# Altium PCB main_V3.0.PcbDoc
Units mm, origin at the board's own origin, x right, y up, seen from the top; angles counter-clockwise.
Board outline 144.58 x 96.87 mm, 2 copper layers (Top Layer, Bottom Layer); 81 components, 42 nets, 482 pads, 102 vias.
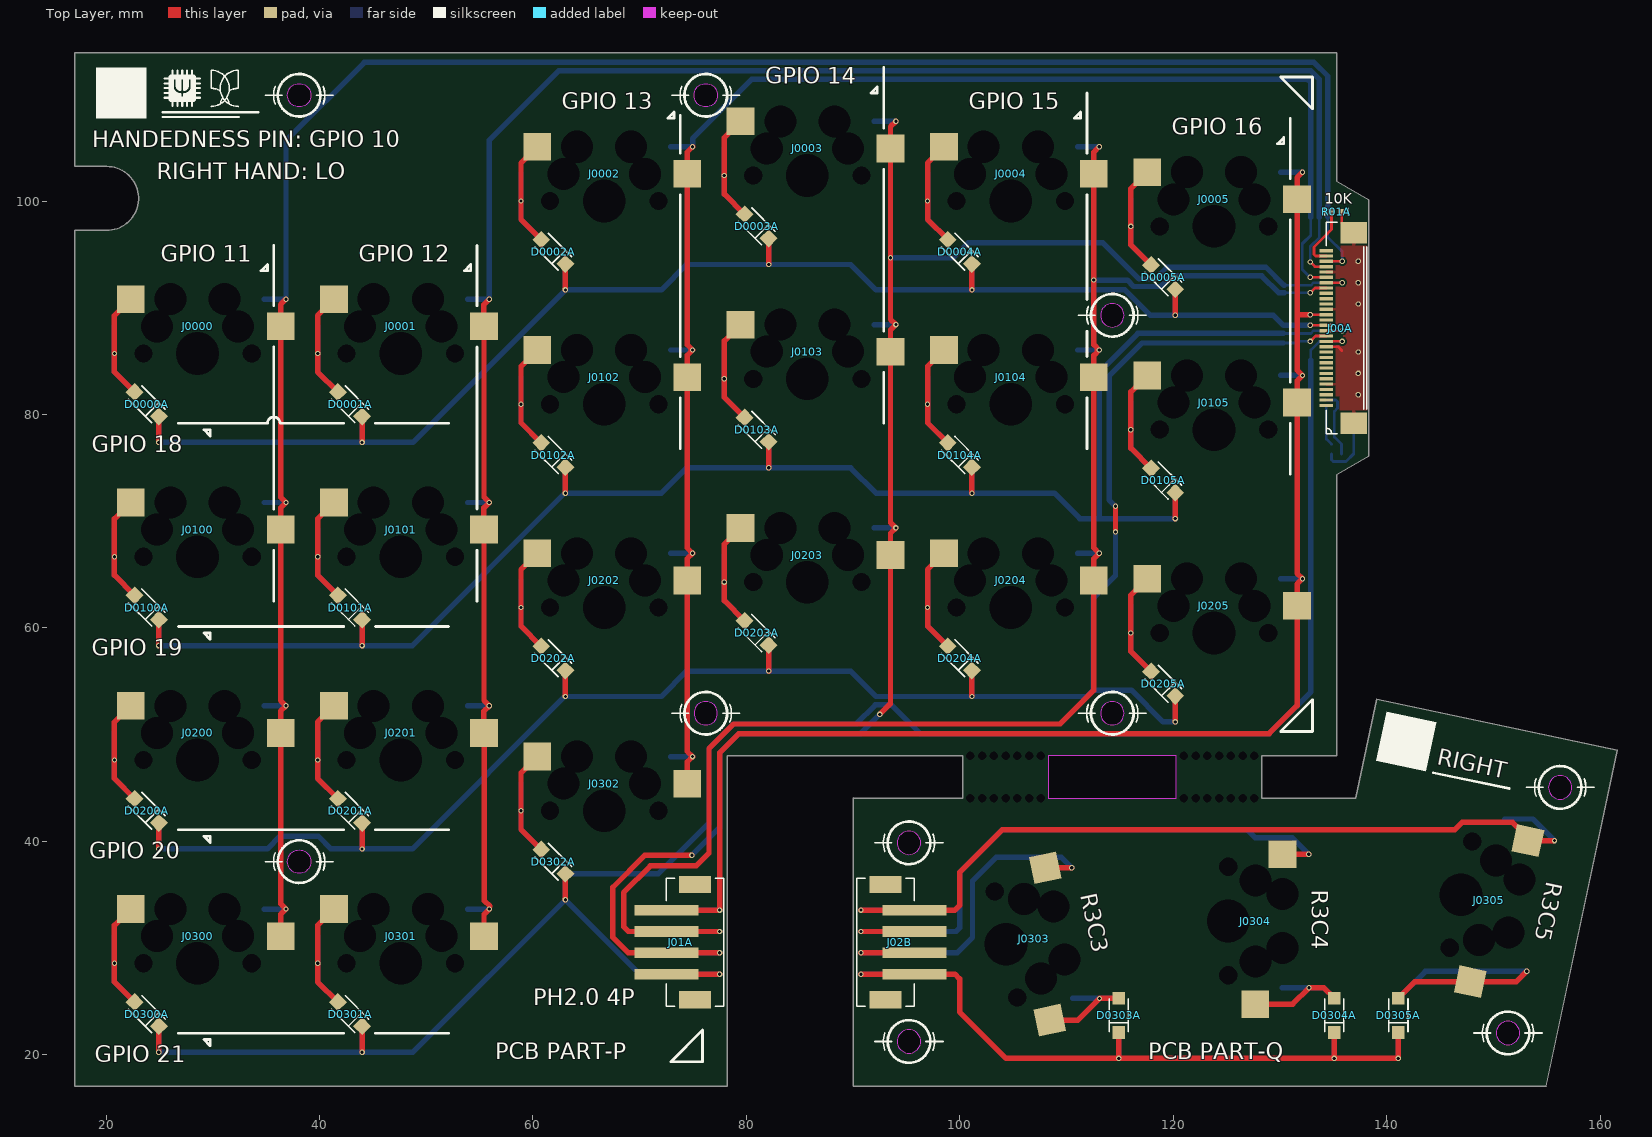
[diagram p0: Top Layer view]
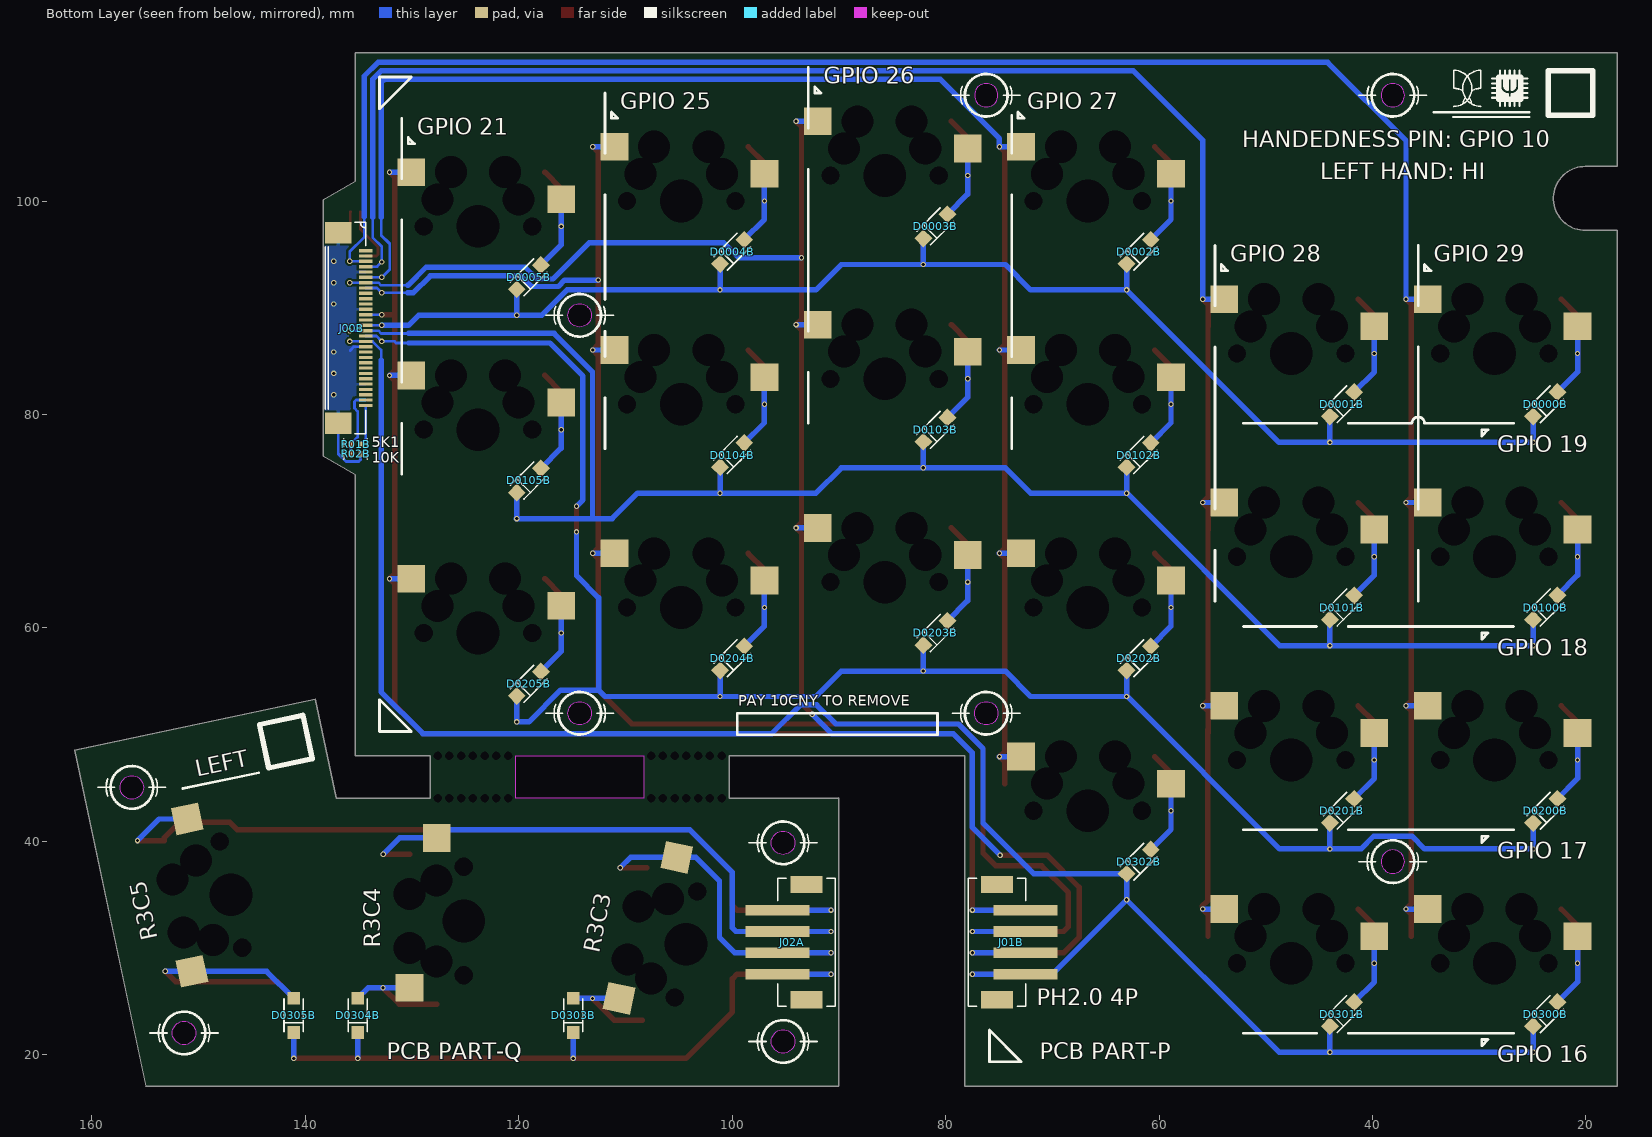
[diagram p1: Bottom Layer view, seen from below]
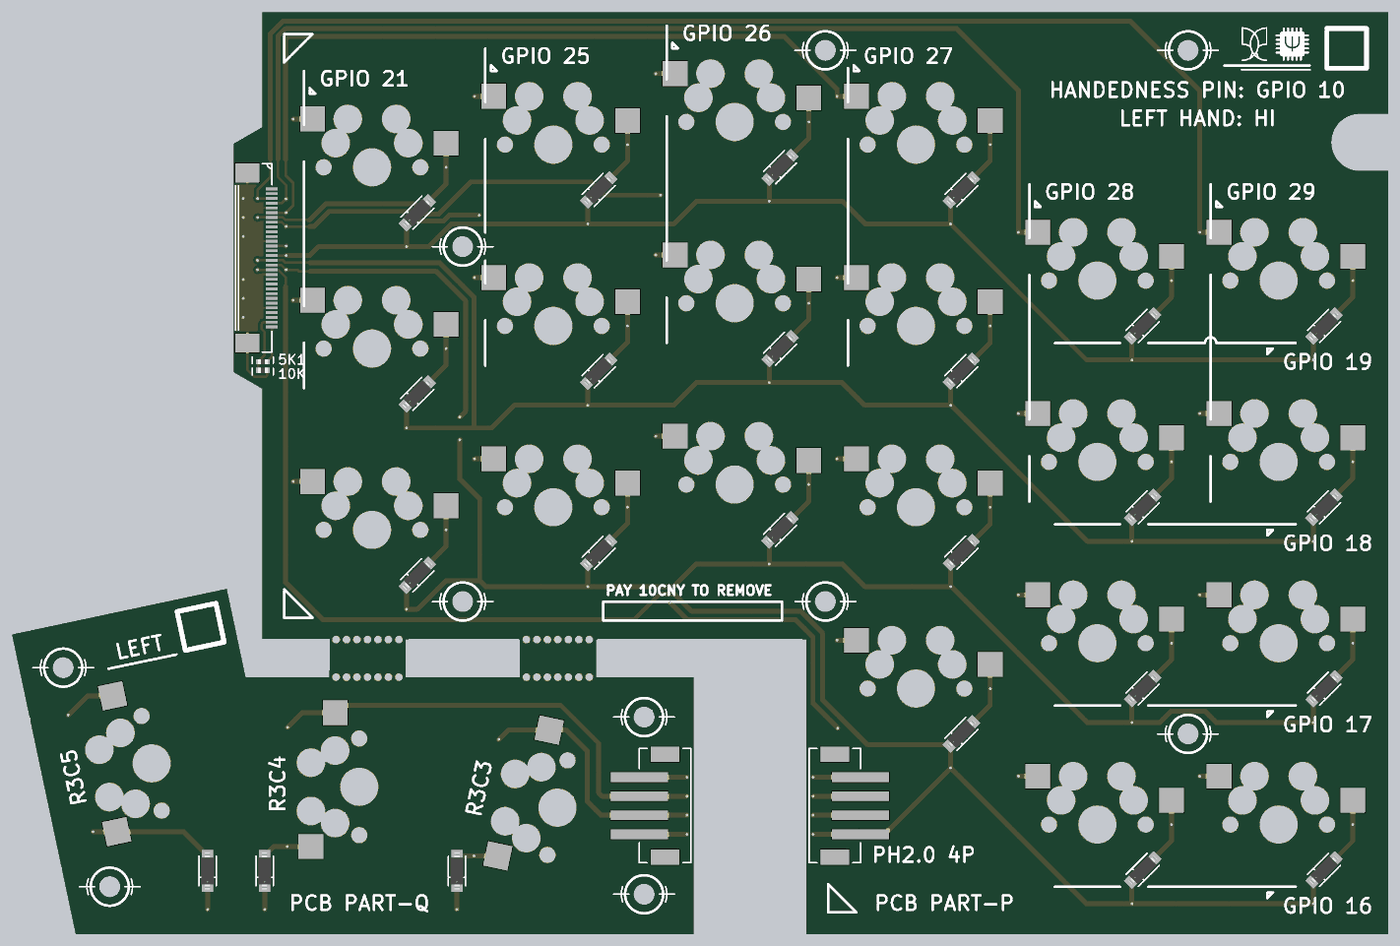
[diagram p2: 3D render of the assembled board from below, using the file's embedded part models]

## Layer stack, top to bottom
Top Solder: solder mask 0.0102, Solder Resist, Dk 3.5
Top Layer: signal copper 0.0356
Dielectric 1: dielectric 0.32, FR-4, Dk 4.8
Bottom Layer: signal copper 0.0356
Bottom Solder: solder mask 0.0102, Solder Resist, Dk 3.5

## Board outline
17.05,17.05 78.2,17.05 78.2,48.006 100.3,48.006 100.3,44.061 90.043,44.061 90.042,44.069 90.042,17.05 154.94,17.05 161.634,48.541 139.087,53.333 137.116,44.061 128.3,44.061 128.3,48.006 135.35,48.006 135.35,74.374 138.35,76.106 138.35,100.106 135.35,101.838 135.35,113.919 17.05,113.919 17.05,103.25 20.05,103.25 cw(c20.05,100.25) 20.05,97.25 17.05,97.25
cut-out: 155.167,45.056 ccw(c156.267,45.056) 156.267,43.956 ccw(c156.267,45.056) 157.367,45.056 ccw(c156.267,45.056) 156.267,46.156 ccw(c156.267,45.056)
cut-out: 150.276,22.045 ccw(c151.376,22.045) 151.376,20.945 ccw(c151.376,22.045) 152.476,22.045 ccw(c151.376,22.045) 151.376,23.145 ccw(c151.376,22.045)
cut-out: 94.141,21.249 ccw(c95.241,21.249) 95.241,20.149 ccw(c95.241,21.249) 96.341,21.249 ccw(c95.241,21.249) 95.241,22.349 ccw(c95.241,21.249)
cut-out: 94.141,39.862 ccw(c95.241,39.862) 95.241,38.762 ccw(c95.241,39.862) 96.341,39.862 ccw(c95.241,39.862) 95.241,40.962 ccw(c95.241,39.862)
cut-out: 113.2,52.006 ccw(c114.3,52.006) 114.3,50.906 ccw(c114.3,52.006) 115.4,52.006 ccw(c114.3,52.006) 114.3,53.106 ccw(c114.3,52.006)
cut-out: 113.2,89.297 ccw(c114.3,89.297) 114.3,88.197 ccw(c114.3,89.297) 115.4,89.297 ccw(c114.3,89.297) 114.3,90.397 ccw(c114.3,89.297)
cut-out: 76.2,108.819 cw(c76.2,109.919) 75.1,109.919 cw(c76.2,109.919) 76.2,111.019 cw(c76.2,109.919) 77.3,109.919 cw(c76.2,109.919)
cut-out: 75.1,52.006 ccw(c76.2,52.006) 76.2,50.906 ccw(c76.2,52.006) 77.3,52.006 ccw(c76.2,52.006) 76.2,53.106 ccw(c76.2,52.006)
cut-out: 38.1,37 cw(c38.1,38.1) 37,38.1 cw(c38.1,38.1) 38.1,39.2 cw(c38.1,38.1) 39.2,38.1 cw(c38.1,38.1)
cut-out: 38.1,108.819 cw(c38.1,109.919) 37,109.919 cw(c38.1,109.919) 38.1,111.019 cw(c38.1,109.919) 39.2,109.919 cw(c38.1,109.919)
cut-out: 108.3,44.061 120.3,44.061 120.3,48.006 108.3,48.006

## Design rules (kind name [scope] priority, off if disabled: settings)
Clearance [All] p1: gap=0.254 ignorepadtopadclearanceinfootprint=FALSE except(0.102: Arc-Arc Arc-Track Arc-SMDPad Track-Track Track-SMDPad; 0.152: SMDPad-SMDPad SMDPad-Hole; 0.2: Via-Fill Via-Poly Via-Region; 0.203: Arc-Via Arc-Hole Track-Via Track-Hole Via-Via; 0.279: Arc-THPad Track-THPad; 0.457: THPad-THPad)
HoleSize [All] p1: absolutevalues=TRUE maxlimit=10 minlimit=0.025 maxpercent=80.000 minpercent=20.000
PolygonConnect [All] p1: thpad.connectstyle=Relief thpad.reliefconductorwidth=0.254 thpad.reliefentries=4 thpad.polygonreliefangle="90 Angle" thpad.airgapwidth=0.254 smdpad.connectstyle=Relief smdpad.reliefconductorwidth=0.254 smdpad.reliefentries=4 smdpad.polygonreliefangle="90 Angle" smdpad.airgapwidth=0.254 via.connectstyle=Direct via.reliefconductorwidth=0.254 via.reliefentries=4 via.polygonreliefangle="90 Angle" via.airgapwidth=0.254
RoutingVias [All] p1: holewidth=0.3 width=0.5 viastyle="Through Hole" minholewidth=0.2 minwidth=0.45 maxholewidth=0.711 maxwidth=1.27
SolderMaskExpansion [All] p1: expansion=0.102 istentingtop=FALSE
SupplyNets "Schematic Supply Nets_1" [InNet('+5')] p1: voltage=0.000
SupplyNets "Schematic Supply Nets" [InNet('GND')] p2: voltage=0.000
Width [All] p1: maxlimit=2.54 minlimit=0.102 preferedwidth=0.254 minimp=50.000000 maximp=50.000000 favimp=50.000000
29 further rules are at their usual default settings.

## Components (designator, comment, footprint, x,y, rotation, side; value= is the part's Value field where it differs from the comment)
D0000A "1N4148W" SOD123_DIO 23.812,80.962 r135 top
D0000B "1N4148W" SOD123_DIO 23.812,80.962 r135 bottom
D0001A "1N4148W" SOD123_DIO 42.862,80.962 r135 top
D0001B "1N4148W" SOD123_DIO 42.862,80.962 r135 bottom
D0002A "1N4148W" SOD123_DIO 61.912,95.25 r135 top
D0002B "1N4148W" SOD123_DIO 61.912,95.25 r135 bottom
D0003A "1N4148W" SOD123_DIO 80.962,97.631 r135 top
D0003B "1N4148W" SOD123_DIO 80.962,97.631 r135 bottom
D0004A "1N4148W" SOD123_DIO 100.013,95.25 r135 top
D0004B "1N4148W" SOD123_DIO 100.013,95.25 r135 bottom
D0005A "1N4148W" SOD123_DIO 119.062,92.869 r135 top
D0005B "1N4148W" SOD123_DIO 119.062,92.869 r135 bottom
D0100A "1N4148W" SOD123_DIO 23.812,61.912 r135 top
D0100B "1N4148W" SOD123_DIO 23.812,61.912 r135 bottom
D0101A "1N4148W" SOD123_DIO 42.862,61.912 r135 top
D0101B "1N4148W" SOD123_DIO 42.862,61.912 r135 bottom
D0102A "1N4148W" SOD123_DIO 61.912,76.2 r135 top
D0102B "1N4148W" SOD123_DIO 61.912,76.2 r135 bottom
D0103A "1N4148W" SOD123_DIO 80.962,78.581 r135 top
D0103B "1N4148W" SOD123_DIO 80.962,78.581 r135 bottom
D0104A "1N4148W" SOD123_DIO 100.013,76.2 r135 top
D0104B "1N4148W" SOD123_DIO 100.013,76.2 r135 bottom
D0105A "1N4148W" SOD123_DIO 119.062,73.819 r135 top
D0105B "1N4148W" SOD123_DIO 119.062,73.819 r135 bottom
D0200A "1N4148W" SOD123_DIO 23.812,42.862 r135 top
D0200B "1N4148W" SOD123_DIO 23.812,42.862 r135 bottom
D0201A "1N4148W" SOD123_DIO 42.862,42.862 r135 top
D0201B "1N4148W" SOD123_DIO 42.862,42.862 r135 bottom
D0202A "1N4148W" SOD123_DIO 61.912,57.15 r135 top
D0202B "1N4148W" SOD123_DIO 61.912,57.15 r135 bottom
D0203A "1N4148W" SOD123_DIO 80.962,59.531 r135 top
D0203B "1N4148W" SOD123_DIO 80.962,59.531 r135 bottom
D0204A "1N4148W" SOD123_DIO 100.013,57.15 r135 top
D0204B "1N4148W" SOD123_DIO 100.013,57.15 r135 bottom
D0205A "1N4148W" SOD123_DIO 119.062,54.769 r135 top
D0205B "1N4148W" SOD123_DIO 119.062,54.769 r135 bottom
D0300A "1N4148W" SOD123_DIO 23.812,23.812 r135 top
D0300B "1N4148W" SOD123_DIO 23.812,23.812 r135 bottom
D0301A "1N4148W" SOD123_DIO 42.862,23.812 r135 top
D0301B "1N4148W" SOD123_DIO 42.862,23.812 r135 bottom
D0302A "1N4148W" SOD123_DIO 61.912,38.1 r135 top
D0302B "1N4148W" SOD123_DIO 61.912,38.1 r135 bottom
D0303A "1N4148W" SOD123_DIO 114.9,23.7 r90 top
D0303B "1N4148W" SOD123_DIO 114.9,23.7 r90 bottom
D0304A "1N4148W" SOD123_DIO 135.1,23.7 r90 top
D0304B "1N4148W" SOD123_DIO 135.1,23.7 r90 bottom
D0305A "1N4148W" SOD123_DIO 141.1,23.7 r90 top
D0305B "1N4148W" SOD123_DIO 141.1,23.7 r90 bottom
J0000 "Gateron_V2" Gateron_V2 28.575,85.725 r180 top
J00A "FPC-05F-20PH20" FPC-05F-30PH20 134.35,88.106 r90 top
J00B "FPC-05F-20PH20" FPC-05F-30PH20 134.35,88.106 r270 bottom
J0001 "Gateron_V2" Gateron_V2 47.625,85.725 r180 top
J01A "PH2.0x4" PH2.0x4P 75.5,30.555 r270 top
J01B "PH2.0x4" PH2.0x4P 75.5,30.555 r90 bottom
J0002 "Gateron_V2" Gateron_V2 66.675,100.013 r180 top
J02A "PH2.0x4" PH2.0x4P 92.742,30.555 r270 bottom
J02B "PH2.0x4" PH2.0x4P 92.742,30.555 r90 top
J0003 "Gateron_V2" Gateron_V2 85.725,102.394 r180 top
J0004 "Gateron_V2" Gateron_V2 104.775,100.013 r180 top
J0005 "Gateron_V2" Gateron_V2 123.825,97.631 r180 top
J0100 "Gateron_V2" Gateron_V2 28.575,66.675 r180 top
J0101 "Gateron_V2" Gateron_V2 47.625,66.675 r180 top
J0102 "Gateron_V2" Gateron_V2 66.675,80.962 r180 top
J0103 "Gateron_V2" Gateron_V2 85.725,83.344 r180 top
J0104 "Gateron_V2" Gateron_V2 104.775,80.962 r180 top
J0105 "Gateron_V2" Gateron_V2 123.825,78.581 r180 top
J0200 "Gateron_V2" Gateron_V2 28.575,47.625 r180 top
J0201 "Gateron_V2" Gateron_V2 47.625,47.625 r180 top
J0202 "Gateron_V2" Gateron_V2 66.675,61.912 r180 top
J0203 "Gateron_V2" Gateron_V2 85.725,64.294 r180 top
J0204 "Gateron_V2" Gateron_V2 104.775,61.912 r180 top
J0205 "Gateron_V2" Gateron_V2 123.825,59.531 r180 top
J0300 "Gateron_V2" Gateron_V2 28.575,28.575 r180 top
J0301 "Gateron_V2" Gateron_V2 47.625,28.575 r180 top
J0302 "Gateron_V2" Gateron_V2 66.675,42.862 r180 top
J0303 "Gateron_V2" Gateron_V2 104.34,30.347 r102 top
J0304 "Gateron_V2" Gateron_V2 125.162,32.536 r90 top
J0305 "Gateron_V2" Gateron_V2 146.974,35.006 r78 top
R01A "10K" RES0402_CPF_TYCO_TYC 135.3,99 r0 top
R01B "5.1K" RES0402_CPF_TYCO_TYC 135.3,77.2 r0 bottom
R02B "10K" RES0402_CPF_TYCO_TYC 135.3,76.3 r180 bottom

## Footprints (in the part's own frame and the unit in brackets; to place one, negate y for a bottom-side part, rotate by r counter-clockwise, add the part's x,y. Pads: shape width x height; smd on the part's side, far side on the other; paste and mask are expansions set on the pad)
FPC-05F-30PH20 [mm]
  rect 0.3x1.25 smd mask+0: 1(-7.25,0) 2(-6.75,0) 3(-6.25,0) 4(-5.75,0) 5(-5.25,0) 6(-4.75,0) 7(-4.25,0) 8(-3.75,0) 9(-3.25,0) 10(-2.75,0) 11(-2.25,0) 12(-1.75,0) 13(-1.25,0) 14(-0.75,0) 15(-0.25,0) 16(0.25,0) 17(0.75,0) 18(1.25,0) 19(1.75,0) 20(2.25,0) 21(2.75,0) 22(3.25,0) 23(3.75,0) 24(4.25,0) 25(4.75,0) 26(5.25,0) 27(5.75,0) 28(6.25,0) 29(6.75,0) 30(7.25,0)
  rect 2x2.5 smd: P1(-8.94,-2.575) P2(8.94,-2.575)
  silkscreen extent -9.9,-3.8 9.9,0
Gateron_V2 [mm]
  rect 2.6x2.6 smd: 1(-7.79,-2.54) 2(6.26,-5.08)
  rect 2.6x2.6 smd far side: 1(-6.26,-5.08) 2(7.79,-2.54)
  round 0 hole 1.7: ""(-5.08,0) ""(5.08,0)
  round 0 hole 3: ""(-3.81,-2.54) ""(-2.54,-5.08) ""(2.54,-5.08) ""(3.81,-2.54)
  round 0 hole 4: ""(0,0)
PH2.0x4P [mm]
  rect 1x6 smd: 1(-3,-3) 2(-1,-3) 3(1,-3) 4(3,-3)
  rect 1.6x3 smd: P1(-5.4,-0.3) P2(5.4,-0.3)
  silkscreen extent -6,-3 6,2.4
RES0402_CPF_TYCO_TYC [mil]
  rect 20x22 smd paste+0 mask+0: 1(-18.5,0) 2(18.5,0)
  body extent -21,-11 21,11, height 14
SOD123_DIO [mm]
  rect 1.2x1.2 smd paste+0 mask+0: A(1.6,0) K(-1.6,0)
  silkscreen extent -1.55,-0.9 1.55,0.9, body extent -1.93,-0.67 1.93,0.67, height 0.81

## Part data
D0000A D0000B D0001A D0001B D0002A D0002B D0003A D0003B D0004A D0004B D0005A D0005B D0100A D0100B D0101A D0101B D0102A D0102B D0103A D0103B D0104A D0104B D0105A D0105B D0200A D0200B D0201A D0201B D0202A D0202B D0203A D0203B D0204A D0204B D0205A D0205B D0300A D0300B D0301A D0301B D0302A D0302B D0303A D0303B D0304A D0304B D0305A D0305B: "Small Signal Diode"
J0000 J0001 J0002 J0003 J0004 J0005 J0100 J0101 J0102 J0103 J0104 J0105 J0200 J0201 J0202 J0203 J0204 J0205 J0300 J0301 J0302 J0303 J0304 J0305: "Gateron hotswap socket V2.0"
J00A J00B: library part FPC-05F-30PH20, "30 Pin 0.5 Pitch FPC connector"
J01A J01B J02A J02B: "PH2.0 4Pin Connector (vertical SMD)"
R01A R01B R02B: library part R0402, "CPF 0402 RL", Manufacturer_Name="TE Connectivity", Manufacturer_Part_Number=CPF0402B33RE1, Copyright="Copyright (C) 2025 Ultra Librarian. All rights reserved.", Datasheet=https://www.te.com/commerce/DocumentDelivery/DDEController?Action=srchrtrv&DocNm=1773200&DocType=Data+Sheet&DocLang=English&PartCntxt=1-1879208-3&DocFormat=pdf

## Free pads (board coordinates)
  round 0 hole 0.8: 2(101,44.061) 2(101,48.006) 2(102.1,44.061) 2(102.1,48.006) 2(103.2,44.061) 2(103.2,48.006) 2(104.3,44.061) 2(104.3,48.006) 2(105.4,44.061) 2(105.4,48.006) 2(106.5,44.061) 2(106.5,48.006) 2(107.6,44.061) 2(107.6,48.006) 2(121,44.061) 2(121,48.006) 2(122.1,44.061) 2(122.1,48.006) 2(123.2,44.061) 2(123.2,48.006) 2(124.3,44.061) 2(124.3,48.006) 2(125.4,44.061) 2(125.4,48.006) 2(126.5,44.061) 2(126.5,48.006) 2(127.6,44.061) 2(127.6,48.006)

## Via types
v1: diameter 0.5, hole 0.3, Top Layer to Bottom Layer, tented both sides, 102 vias

## Nets (pads, with @x,y where several pads share a name; then routed paths per layer and width w, separated by ;. In a path a pad name is that pad's centre, name@x,y a point inside that pad or via, vN(x,y) a via of type N, cw(c..) or ccw(c..) an arc to the next point about the centre after c; other vN are vias at no path point)
+5: J00B.30 R01B.1 | length 3.9
  Bottom Layer w0.254: J00B.30 134.35,77.706 134.83,77.225 R01B.1
COL0: J0000.1 J00A.28 J00B.3 J0100.1 J0200.1 J0300.1 | length 206.2
  Top Layer w0.254: J00A.28 v1(135.85,94.356)
  Top Layer w0.508: J0300.1@36.365,31.115 36.365,33.155 v1(36.865,33.655) 36.365,34.155 36.365,50.165 36.365,52.205 v1(36.865,52.705) 36.365,53.205 36.365,69.215 36.365,71.255 v1(36.865,71.755) 36.365,72.255 36.365,88.265 36.365,90.305 v1(36.865,90.805)
  Bottom Layer w0.254: J00B.3 v1(135.85,94.356) 135.85,95.25 134.5,96.6 134.5,98.506
  Bottom Layer w0.508: J0300.1@34.835,33.655 v1(36.865,33.655) ; J0200.1@34.835,52.705 v1(36.865,52.705) ; J0100.1@34.835,71.755 v1(36.865,71.755) ; J0000.1@34.835,90.805 v1(36.865,90.805) 36.865,105.665 44.2,113 133.2,113 134.5,111.7 134.5,98.506
COL1: J00A.27 J00B.4 J0001.1 J0101.1 J0201.1 J0301.1 | length 185.8
  Top Layer w0.254: v1@132.8,94.3 v1@132.804,94.3 ; v1@132.854,94.3 133.298,93.856 J00A.27
  Top Layer w0.508: J0301.1@55.415,31.115 55.415,33.155 v1(55.915,33.655) ; J0201.1@55.415,50.165 55.415,52.205 v1(55.915,52.705) 55.415,53.205 55.415,69.215 55.415,71.255 v1(55.915,71.755) 55.415,72.255 55.415,88.265 55.415,90.305 v1(55.915,90.805) ; J0201.1@55.46,50.443 55.46,34.433 55.959,33.933
  Bottom Layer w0.254: 133.7,98.5 133.7,96.6 132.85,95.75 v1(132.85,94.3) 132.854,94.3 133.298,93.856 J00B.4
  Bottom Layer w0.508: J0301.1@53.885,33.655 v1(55.915,33.655) ; J0201.1@53.885,52.705 v1(55.915,52.705) ; J0101.1@53.885,71.755 v1(55.915,71.755) ; J0001.1@53.885,90.805 v1(55.915,90.805) 55.915,105.715 62.4,112.2 132.9,112.2 133.7,111.4 133.7,98.5
COL2: J00A.25 J00B.6 J0002.1 J0102.1 J0202.1 J0302.1 | length 152.3
  Top Layer w0.254: v1(132.85,92.856) J00A.25
  Top Layer w0.508: J0302.1@74.465,45.403 74.465,47.442 v1(74.965,47.942) 74.465,48.442 74.465,64.453 74.465,66.492 v1(74.965,66.992) 74.465,67.492 74.465,83.502 74.465,85.542 v1(74.965,86.042) 74.465,86.542 74.465,102.552 74.465,104.592 v1(74.965,105.093)
  Bottom Layer w0.254: 132.9,98.494 132.9,96.8 132.1,96 132.1,93.606 v1(132.85,92.856) J00B.6
  Bottom Layer w0.508: J0302.1@72.935,47.942 v1(74.965,47.942) ; J0202.1@72.935,66.992 v1(74.965,66.992) ; J0102.1@72.935,86.042 v1(74.965,86.042) ; J0002.1@72.935,105.093 v1(74.965,105.093) 74.965,105.865 80.5,111.4 132.6,111.4 132.9,111.1 132.9,98.494
COL3: J00A.24 J00B.7 J01A.3 J01B.2 J0003.1 J0103.1 J0203.1 | length 166.3
  Top Layer w0.254: J00A.24 v1(135.85,92.356)
  Top Layer w0.508: v1(74.9,38.7) 70.5,38.7 67.5,35.7 67.5,31 68.945,29.555 J01A.3 v1(77.5,29.555) ; v1(92.5,51.9) 93.515,52.915 93.515,66.834 93.515,68.874 v1(94.015,69.374) 93.515,69.874 93.515,85.884 93.515,87.924 v1(94.015,88.424) 93.515,88.924 v1(93.515,94.7) 93.515,104.934 93.515,106.974 v1(94.015,107.474)
  Bottom Layer w0.254: 130.4,92.1 132.915,92.1 133.171,92.356 J00B.7 v1(135.85,92.356)
  Bottom Layer w0.508: J01B.2 v1(77.5,29.555) ; v1(74.9,38.7) 77.5,41.3 77.5,48.3 79.3,50.1 90.7,50.1 v1(92.5,51.9) ; J0203.1@91.985,69.374 v1(94.015,69.374) ; J0103.1@91.985,88.424 v1(94.015,88.424) ; J0003.1@91.985,107.474 v1(94.015,107.474) ; v1(93.515,94.7) 99.4,94.7 100.8,96.1 113.4,96.1 116.8,92.7 118.3,92.7 119.4,93.8 128.7,93.8 130.4,92.1
COL3_Q: J02A.3 J02B.2 J0303.2 | length 34.5
  Top Layer w0.508: v1(90.742,29.556) J02B.2 ; J0303.2@108.008,37.527 v1(110.5,37.527)
  Bottom Layer w0.508: v1(90.742,29.556) J02A.3 99.755,29.555 101.2,31 101.2,36.3 103.395,38.495 105.205,38.495 109.532,38.495 v1(110.5,37.527)
COL4: J00A.23 J00B.8 J01A.2 J01B.3 J0004.1 J0104.1 J0204.1 | length 158.1
  Top Layer w0.254: v1@132.8,91.412 v1@132.804,91.412 ; v1@132.854,91.412 133.298,91.856 J00A.23
  Top Layer w0.508: J01A.2 v1(77.5,31.555) ; J01A.2 68.945,31.555 68.5,32 68.5,35.2 71,37.7 75.3,37.7 76.5,38.9 76.5,48.7 78.8,51 109.4,51 112.565,54.165 112.565,64.453 112.565,66.492 v1(113.065,66.992) 112.565,67.492 112.565,83.502 112.565,85.542 v1(113.065,86.042) 112.565,86.542 v1(112.565,92.6) 112.565,102.552 112.565,104.592 v1(113.065,105.093)
  Bottom Layer w0.254: 130.4,91.4 130.412,91.412 v1(132.85,91.412) 132.854,91.412 133.298,91.856 J00B.8
  Bottom Layer w0.508: J01B.3 v1(77.5,31.555) ; J0204.1@111.035,66.992 v1(113.065,66.992) ; J0104.1@111.035,86.042 v1(113.065,86.042) ; J0004.1@111.035,105.093 v1(113.065,105.093) ; v1(112.565,92.6) 115.7,92.6 116.3,92 118.8,92 119.8,93 128.3,93 129.9,91.4 130.4,91.4
COL4_Q: J02A.2 J02B.3 J0304.2 | length 57.4
  Top Layer w0.508: v1(90.742,31.556) J02B.3@95.742,31.556 ; J0304.2@130.242,38.796 v1(132.7,38.796)
  Bottom Layer w0.508: v1(90.742,31.556) 95.742,31.556 99.655,31.555 100,31.9 100,37.1 104,41.1 126.928,41.1 127.702,40.326 131.17,40.326 v1(132.7,38.796)
COL5: J00A.18 J00B.13 J01A.1 J01B.4 J0005.1 J0105.1 J0205.1 | length 142.1
  Top Layer w0.254: v1(132.85,89.356) J00A.18
  Top Layer w0.508: J01A.1 v1(77.5,33.555) 77.5,48.3 79.3,50.1 129,50.1 131.615,52.715 131.615,62.071 131.615,64.111 v1(132.115,64.611) 131.615,65.111 131.615,81.121 131.615,83.161 v1(132.115,83.661) 131.615,84.161 131.615,89.3 ; v1(132.115,102.711) 131.615,102.211 131.615,100.171 131.615,89.3 ; v1(132.85,89.356) 131.671,89.356 131.615,89.3
  Bottom Layer w0.254: v1(132.85,89.356) J00B.13
  Bottom Layer w0.508: J01B.4 v1(77.5,33.555) ; J0205.1@130.085,64.611 v1(132.115,64.611) ; J0105.1@130.085,83.661 v1(132.115,83.661) ; J0005.1@130.085,102.711 v1(132.115,102.711)
COL5_Q: J02A.1 J02B.4 J0305.2 | length 81.6
  Top Layer w0.508: v1(90.742,33.556) J02B.4 99.555,33.555 100,34 100,37.1 104,41.1 146.4,41.1 147.1,41.8 151.772,41.8 153.245,40.327 153.245,40.073 v1(155.737,40.073)
  Bottom Layer w0.508: v1(90.742,33.556) J02A.1 ; J0305.2@151.078,42.097 153.713,42.097 v1(155.737,40.073)
GND: J00A.5 J00A.12 J00A.19 J00A.26 J00A.P1 J00A.P2 J00B.5 J00B.12 J00B.19 J00B.26 J00B.P1 J00B.P2 R01A.2 R02B.2 | length 11.6
  Top Layer w0.254: J00A.12 135.444,86.356 135.8,86 ; R01A.2 135.802,98.968 135.802,97.919 136.675,97.046 J00A.P2
  Bottom Layer w0.254: J00B.19 135.444,86.356 135.8,86 ; R02B.2 134.83,75.77 135,75.6 136.2,75.6 136.925,76.325 J00B.P2
  other v1: 137.35,81.856 137.35,83.856 137.35,85.856 137.35,90.356 137.35,92.356 137.35,94.356
HAND_A: J00A.29 R01A.1 | length 5.9
  Top Layer w0.254: J00A.29 133.349,94.856 133.2,95.005 133.2,95.7 134.83,97.33 R01A.1
HAND_B: J00B.29 R01B.2 R02B.1 | length 6.4
  Bottom Layer w0.254: J00B.29 135.244,81.356 135.4,81.2 135.4,80.6 135.1,80.3 135.1,77.895 135.77,77.225 R01B.2 R02B.1
NetD0000A_A: D0000A.A D0000B.A J0000.2 | length 17.1
  Top Layer w0.508: J0000.2@22.315,90.805 20.785,89.275 v1(20.785,85.725) 20.785,83.99 D0000A.A
  Bottom Layer w0.508: J0000.2@20.785,88.265 v1(20.785,85.725) 20.785,83.99 D0000B.A
NetD0001A_A: D0001A.A D0001B.A J0001.2 | length 17.1
  Top Layer w0.508: J0001.2@41.365,90.805 39.835,89.275 v1(39.835,85.725) 39.835,83.99 D0001A.A
  Bottom Layer w0.508: J0001.2@39.835,88.265 v1(39.835,85.725) 39.835,83.99 D0001B.A
NetD0002A_A: D0002A.A D0002B.A J0002.2 | length 17.1
  Top Layer w0.508: J0002.2@60.415,105.093 58.885,103.563 v1(58.885,100.012) 58.885,98.278 D0002A.A
  Bottom Layer w0.508: J0002.2@58.885,102.552 v1(58.885,100.012) 58.885,98.278 D0002B.A
NetD0003A_A: D0003A.A D0003B.A J0003.2 | length 17.1
  Top Layer w0.508: J0003.2@79.465,107.474 77.935,105.944 v1(77.935,102.394) 77.935,100.659 D0003A.A
  Bottom Layer w0.508: J0003.2@77.935,104.934 v1(77.935,102.394) 77.935,100.659 D0003B.A
NetD0004A_A: D0004A.A D0004B.A J0004.2 | length 17.1
  Top Layer w0.508: J0004.2@98.515,105.093 96.985,103.563 v1(96.985,100.012) 96.985,98.278 D0004A.A
  Bottom Layer w0.508: J0004.2@96.985,102.552 v1(96.985,100.012) 96.985,98.278 D0004B.A
NetD0005A_A: D0005A.A D0005B.A J0005.2 | length 17.1
  Top Layer w0.508: J0005.2@117.565,102.711 116.035,101.181 v1(116.035,97.631) 116.035,95.896 D0005A.A
  Bottom Layer w0.508: J0005.2@116.035,100.171 v1(116.035,97.631) 116.035,95.896 D0005B.A
NetD0100A_A: D0100A.A D0100B.A J0100.2 | length 17.1
  Top Layer w0.508: J0100.2@22.315,71.755 20.785,70.225 v1(20.785,66.675) 20.785,64.94 D0100A.A
  Bottom Layer w0.508: J0100.2@20.785,69.215 v1(20.785,66.675) 20.785,64.94 D0100B.A
NetD0101A_A: D0101A.A D0101B.A J0101.2 | length 17.1
  Top Layer w0.508: J0101.2@41.365,71.755 39.835,70.225 v1(39.835,66.675) 39.835,64.94 D0101A.A
  Bottom Layer w0.508: J0101.2@39.835,69.215 v1(39.835,66.675) 39.835,64.94 D0101B.A
NetD0102A_A: D0102A.A D0102B.A J0102.2 | length 17.1
  Top Layer w0.508: J0102.2@60.415,86.042 58.885,84.513 v1(58.885,80.962) 58.885,79.228 D0102A.A
  Bottom Layer w0.508: J0102.2@58.885,83.502 v1(58.885,80.962) 58.885,79.228 D0102B.A
NetD0103A_A: D0103A.A D0103B.A J0103.2 | length 17.1
  Top Layer w0.508: J0103.2@79.465,88.424 77.935,86.894 v1(77.935,83.344) 77.935,81.609 D0103A.A
  Bottom Layer w0.508: J0103.2@77.935,85.884 v1(77.935,83.344) 77.935,81.609 D0103B.A
NetD0104A_A: D0104A.A D0104B.A J0104.2 | length 17.1
  Top Layer w0.508: J0104.2@98.515,86.042 96.985,84.513 v1(96.985,80.962) 96.985,79.228 D0104A.A
  Bottom Layer w0.508: J0104.2@96.985,83.502 v1(96.985,80.962) 96.985,79.228 D0104B.A
NetD0105A_A: D0105A.A D0105B.A J0105.2 | length 17.1
  Top Layer w0.508: J0105.2@117.565,83.661 116.035,82.131 v1(116.035,78.581) 116.035,76.846 D0105A.A
  Bottom Layer w0.508: J0105.2@116.035,81.121 v1(116.035,78.581) 116.035,76.846 D0105B.A
NetD0200A_A: D0200A.A D0200B.A J0200.2 | length 17.1
  Top Layer w0.508: J0200.2@22.315,52.705 20.785,51.175 v1(20.785,47.625) 20.785,45.89 D0200A.A
  Bottom Layer w0.508: J0200.2@20.785,50.165 v1(20.785,47.625) 20.785,45.89 D0200B.A
NetD0201A_A: D0201A.A D0201B.A J0201.2 | length 17.1
  Top Layer w0.508: J0201.2@41.365,52.705 39.835,51.175 v1(39.835,47.625) 39.835,45.89 D0201A.A
  Bottom Layer w0.508: J0201.2@39.835,50.165 v1(39.835,47.625) 39.835,45.89 D0201B.A
NetD0202A_A: D0202A.A D0202B.A J0202.2 | length 17.1
  Top Layer w0.508: J0202.2@60.415,66.992 58.885,65.463 v1(58.885,61.912) 58.885,60.178 D0202A.A
  Bottom Layer w0.508: J0202.2@58.885,64.453 v1(58.885,61.912) 58.885,60.178 D0202B.A
NetD0203A_A: D0203A.A D0203B.A J0203.2 | length 17.1
  Top Layer w0.508: J0203.2@79.465,69.374 77.935,67.844 v1(77.935,64.294) 77.935,62.559 D0203A.A
  Bottom Layer w0.508: J0203.2@77.935,66.834 v1(77.935,64.294) 77.935,62.559 D0203B.A
NetD0204A_A: D0204A.A D0204B.A J0204.2 | length 17.1
  Top Layer w0.508: J0204.2@98.515,66.992 96.985,65.463 v1(96.985,61.912) 96.985,60.178 D0204A.A
  Bottom Layer w0.508: J0204.2@96.985,64.453 v1(96.985,61.912) 96.985,60.178 D0204B.A
NetD0205A_A: D0205A.A D0205B.A J0205.2 | length 17.1
  Top Layer w0.508: J0205.2@117.565,64.611 116.035,63.081 v1(116.035,59.531) 116.035,57.796 D0205A.A
  Bottom Layer w0.508: J0205.2@116.035,62.071 v1(116.035,59.531) 116.035,57.796 D0205B.A
NetD0300A_A: D0300A.A D0300B.A J0300.2 | length 17.1
  Top Layer w0.508: J0300.2@22.315,33.655 20.785,32.125 v1(20.785,28.575) 20.785,26.84 D0300A.A
  Bottom Layer w0.508: J0300.2@20.785,31.115 v1(20.785,28.575) 20.785,26.84 D0300B.A
NetD0301A_A: D0301A.A D0301B.A J0301.2 | length 17.1
  Top Layer w0.508: J0301.2@41.365,33.655 39.835,32.125 v1(39.835,28.575) 39.835,26.84 D0301A.A
  Bottom Layer w0.508: J0301.2@39.835,31.115 v1(39.835,28.575) 39.835,26.84 D0301B.A
NetD0302A_A: D0302A.A D0302B.A J0302.2 | length 17.1
  Top Layer w0.508: J0302.2@60.415,47.942 58.885,46.413 v1(58.885,42.862) 58.885,41.128 D0302A.A
  Bottom Layer w0.508: J0302.2@58.885,45.402 v1(58.885,42.862) 58.885,41.128 D0302B.A
NetD0303A_A: D0303A.A D0303B.A J0303.1 | length 11.6
  Top Layer w0.254: D0303A.A@114.88,25.28 D0303A.A
  Top Layer w0.508: J0303.1@108.444,23.256 111.078,23.256 v1(113.103,25.28) D0303A.A@114.88,25.28
  Bottom Layer w0.508: J0303.1@110.61,25.28 v1(113.103,25.28) D0303B.A@114.88,25.28
NetD0304A_A: D0304A.A D0304B.A J0304.1 | length 13.7
  Top Layer w0.508: J0304.1@127.702,24.746 131.204,24.746 v1(132.734,26.276) 134.124,26.276 D0304A.A
  Bottom Layer w0.508: J0304.1@130.242,26.276 v1(132.734,26.276) 134.124,26.276 D0304B.A
NetD0305A_A: D0305A.A D0305B.A J0305.1 | length 26.2
  Top Layer w0.508: D0305A.A 142.658,26.858 147.839,26.858 152.166,26.858 v1(153.134,27.826)
  Bottom Layer w0.508: D0305B.A 143.626,27.826 v1(153.134,27.826)
ROW0: D0000A.K D0000B.K D0001A.K D0001B.K D0002A.K D0002B.K D0003A.K D0003B.K D0004A.K D0004B.K D0005A.K D0005B.K J00A.16 J00B.15 | length 149.5
  Top Layer w0.254: v1(132.85,88.356) J00A.16
  Top Layer w0.508: v1(24.944,77.391) D0000A.K ; v1(43.994,77.391) D0001A.K ; v1(63.044,91.678) D0002A.K ; v1(82.094,94.059) D0003A.K ; v1(101.144,91.678) D0004A.K ; v1(120.194,89.297) D0005A.K
  Bottom Layer w0.254: v1(132.85,88.356) J00B.15
  Bottom Layer w0.508: D0000B.K v1(24.944,77.391) v1(43.994,77.391) ; D0001B.K v1(43.994,77.391) ; D0002B.K v1(63.044,91.678) ; v1(82.094,94.059) D0003B.K ; D0004B.K v1(101.144,91.678) ; v1(120.194,89.297) D0005B.K ; v1(132.85,88.356) 130.344,88.356 129.403,89.297 v1(120.194,89.297) 117.872,89.297 115.491,91.678 v1(101.144,91.678) ; v1(43.994,77.391) 48.756,77.391 v1(63.044,91.678) ; v1(63.044,91.678) 72.033,91.678 74.414,94.059 v1(82.094,94.059) 89.774,94.059 92.155,91.678 v1(101.144,91.678)
ROW1: D0100A.K D0100B.K D0101A.K D0101B.K D0102A.K D0102B.K D0103A.K D0103B.K D0104A.K D0104B.K D0105A.K D0105B.K J00A.15 J00B.16 | length 173
  Top Layer w0.254: J00A.15 v1(135.85,87.856)
  Top Layer w0.508: v1(24.944,58.341) D0100A.K ; v1(43.994,58.341) D0101A.K ; v1(63.044,72.628) D0102A.K ; v1(82.094,75.009) D0103A.K ; v1(101.144,72.628) D0104A.K ; v1(120.194,70.247) D0105A.K
  Bottom Layer w0.254: 130.3,87.6 132.915,87.6 133.171,87.856 J00B.16 v1(135.85,87.856)
  Bottom Layer w0.508: D0100B.K v1(24.944,58.341) 48.697,58.341 v1@62.985,72.628 ; v1(43.994,58.341) D0101B.K ; D0102B.K v1(63.044,72.628) 72.033,72.628 74.414,75.009 v1(82.094,75.009) 89.774,75.009 92.155,72.628 v1(101.144,72.628) D0104B.K ; v1(82.094,75.009) D0103B.K ; v1@101.203,72.628 108.883,72.628 111.264,70.247 113.1,70.247 ; v1(120.194,70.247) D0105B.K ; v1@120.253,70.247 113.1,70.247 ; 130.3,87.6 116.7,87.6 113.1,84 113.1,70.247
ROW2: D0200A.K D0200B.K D0201A.K D0201B.K D0202A.K D0202B.K D0203A.K D0203B.K D0204A.K D0204B.K D0205A.K D0205B.K J00A.14 J00B.17 | length 189
  Top Layer w0.254: v1(132.85,86.856) 133.35,87.356 J00A.14
  Top Layer w0.508: v1(24.944,39.291) D0200A.K ; v1(43.994,39.291) D0201A.K ; v1(63.044,53.578) D0202A.K ; v1(82.094,55.959) D0203A.K ; v1(101.144,53.578) D0204A.K ; v1(114.6,69) v1(114.6,71.4) ; v1(120.194,51.197) D0205A.K
  Bottom Layer w0.254: 130.3,86.7 131.5,86.7 131.656,86.856 v1(132.85,86.856) 133.35,87.356 J00B.17
  Bottom Layer w0.508: D0200B.K v1(24.944,39.291) 35.123,39.291 36.314,40.481 39.886,40.481 41.077,39.291 v1(43.994,39.291) ; v1@43.935,39.291 v1(43.994,39.291) ; D0201B.K v1(43.994,39.291) ; v1@62.985,53.578 48.697,39.291 v1(43.994,39.291) ; D0202B.K v1(63.044,53.578) 72.033,53.578 74.414,55.96 v1(82.094,55.959) ; D0203B.K v1(82.094,55.959) ; D0204B.K v1(101.144,53.578) ; v1(114.6,69) 114.6,64.9 112.514,62.814 112.514,54.173 ; v1(114.6,71.4) 114,72 114,83.6 117.1,86.7 130.3,86.7 ; v1(120.194,51.197) 119.063,51.197 116.086,54.173 112.514,54.173 ; v1(120.194,51.197) D0205B.K ; v1(82.094,55.959) 89.774,55.96 92.155,53.578 v1(101.144,53.578) ; v1(101.144,53.578) 111.919,53.578 112.514,54.173
ROW3: D0300A.K D0300B.K D0301A.K D0301B.K D0302A.K D0302B.K J00A.13 J00B.18 J01A.4 J01B.1 | length 201.1
  Top Layer w0.254: J00A.13 v1(135.85,86.856)
  Top Layer w0.508: v1(24.944,20.241) D0300A.K ; v1(43.994,20.241) D0301A.K ; v1(63.044,34.528) D0302A.K ; J01A.4@72.5,27.555 v1(77.5,27.555)
  Bottom Layer w0.254: 132.9,85.1 132.9,86.056 133.7,86.856 J00B.18 v1(135.85,86.856)
  Bottom Layer w0.508: v1@24.944,20.24 v1@43.994,20.24 ; v1(24.944,20.241) D0300B.K ; D0301B.K v1(43.994,20.241) 48.756,20.241 v1(63.044,34.528) ; v1(77.5,27.555) 72.5,27.555 70,27.555 63.044,34.511 v1(63.044,34.528) ; 132.9,85.1 132.9,54 129,50.1 96.3,50.1 93.6,52.8 92.1,52.8 90.3,51 78.8,51 76.5,48.7 76.5,41.7 71.769,36.969 D0302B.K v1(63.044,34.528)
ROW3_Q: D0303A.K D0303B.K D0304A.K D0304B.K D0305A.K D0305B.K J02A.4 J02B.1 | length 75.1
  Top Layer w0.508: v1(90.742,27.556) J02B.1 ; J02B.1 99.555,27.556 100,27.111 100,24.011 104.352,19.66 v1(114.9,19.659) D0303A.K ; v1(114.9,19.659) v1(135.1,19.659) ; D0304A.K v1(135.1,19.659) ; D0305A.K v1(141.1,19.659) v1(135.1,19.659)
  Bottom Layer w0.508: v1(90.742,27.556) J02A.4 ; v1(114.9,19.659) D0303B.K ; v1(135.1,19.659) D0304B.K ; v1(141.1,19.659) D0305B.K
pads on no net: J0000. J00A.1 J00A.2 J00A.3 J00A.4 J00A.6 J00A.7 J00A.8 J00A.9 J00A.10 J00A.11 J00A.17 J00A.20 J00A.21 J00A.22 J00A.30 J00B.1 J00B.2 J00B.9 J00B.10 J00B.11 J00B.14 J00B.20 J00B.21 J00B.22 J00B.23 J00B.24 J00B.25 J00B.27 J00B.28 J0001. J01A.P1 J01A.P2 J01B.P1 J01B.P2 J0002. J02A.P1 J02A.P2 J02B.P1 J02B.P2 J0003. J0004. J0005. J0100. J0101. J0102. J0103. J0104. J0105. J0200. J0201. J0202. J0203. J0204. J0205. J0300. J0301. J0302. J0303. J0304. J0305.

## Polygon pours and split planes (outlines as drawn)
GND on Top Layer "NONET_L-01_P-001" (solid, pour order 0): 138.2,98.1 138.2,78.1 135.6,78.1 135.6,81.7 133.7,81.7 133.7,94.5 135.7,94.5 135.7,98.1
GND on Bottom Layer "NONET_L-01_P-001" (solid, pour order 1): 138.2,98.1 138.2,78.1 135.6,78.1 135.6,81.7 133.7,81.7 133.7,94.5 135.7,94.5 135.7,98.1

## Silkscreen, mask and mechanical layers (free items; w line width, h text height)
Top Overlay:
  drawing of 185 lines, arcs and shapes, not listed
  text "GPIO 14" at 81.775,110.982 h1.52
  text "GPIO 13" at 62.725,108.601 h1.52
  text "GPIO 15" at 100.825,108.601 h1.52
  text "GPIO 16" at 119.875,106.22 h1.52
  text "HANDEDNESS PIN: GPIO 10" at 18.709,105.029 h1.52
  text "RIGHT HAND: LO" at 24.762,102.052 h1.52
  text "10K" at 134.207,99.759 h1
  text "GPIO 11" at 25.133,94.313 h1.52
  text "GPIO 12" at 43.675,94.313 h1.52
  text "GPIO 18" at 18.672,76.454 h1.52
  text "GPIO 19" at 18.672,57.404 h1.52
  text "RIGHT" at 144.665,47.225 h1.52 r348
  text "GPIO 20" at 18.418,38.354 h1.52
  text "R3C5" at 155.015,36.314 h1.52 r258
  text "R3C4" at 133.009,35.465 h1.52 r270
  text "R3C3" at 111.289,34.932 h1.52 r282
  text "PH2.0 4P" at 60.055,24.662 h1.52
  text "PCB PART-P" at 56.456,19.602 h1.52
  text "PCB PART-Q" at 117.652,19.602 h1.52
  text "GPIO 21" at 18.926,19.304 h1.52
Bottom Overlay:
  drawing of 197 lines, arcs and shapes, not listed
  text "GPIO 26" at 91.424,110.982 h1.52
  text "GPIO 27" at 72.374,108.601 h1.52
  text "GPIO 25" at 110.474,108.601 h1.52
  text "GPIO 21" at 129.524,106.22 h1.52
  text "HANDEDNESS PIN: GPIO 10" at 52.226,105.029 h1.52
  text "LEFT HAND: HI" at 44.884,102.052 h1.52
  text "GPIO 29" at 34.274,94.313 h1.52
  text "GPIO 28" at 53.324,94.313 h1.52
  text "5K1" at 133.793,76.948 h1
  text "GPIO 19" at 28.321,76.454 h1.52
  text "10K" at 133.793,75.459 h1
  text "GPIO 18" at 28.321,57.404 h1.52
  text "PAY 10CNY TO REMOVE" at 99.427,52.693 h1
  text "LEFT" at 150.129,46.064 h1.52 r348
  text "GPIO 17" at 28.321,38.354 h1.52
  text "R3C5" at 153.854,30.921 h1.52 r258
  text "R3C4" at 133.009,30.02 h1.52 r270
  text "R3C3" at 112.45,29.468 h1.52 r282
  text "PH2.0 4P" at 71.481,24.662 h1.52
  text "PCB PART-P" at 71.183,19.602 h1.52
  text "PCB PART-Q" at 132.379,19.602 h1.52
  text "GPIO 16" at 28.321,19.304 h1.52
Mechanical 1:
  circle w0.152: c151.376,22.045 r1.1
  circle w0.152: c156.267,45.056 r1.1
  circle w0.152: c95.241,21.249 r1.1
  circle w0.152: c95.241,39.862 r1.1
  circle w0.152: c114.3,89.297 r1.1
  circle w0.152: c114.3,52.006 r1.1
  circle w0.152: c76.2,52.006 r1.1
  circle w0.152: c38.1,38.1 r1.1
  circle w0.152: c76.2,109.919 r1.1
  circle w0.152: c38.1,109.919 r1.1
  lines w0.152: 26.194,28.575 30.956,28.575 ; 26.194,47.625 30.956,47.625 ; 26.194,66.675 30.956,66.675 ; 26.194,85.725 30.956,85.725 ; 28.575,26.194 28.575,30.956 ; 28.575,45.244 28.575,50.006 ; 28.575,64.294 28.575,69.056 ; 28.575,83.344 28.575,88.106 ; 45.244,28.575 50.006,28.575 ; 45.244,47.625 50.006,47.625 ; 45.244,66.675 50.006,66.675 ; 45.244,85.725 50.006,85.725 ; 47.625,26.194 47.625,30.956 ; 47.625,45.244 47.625,50.006 ; 47.625,64.294 47.625,69.056 ; 47.625,83.344 47.625,88.106 ; 64.294,42.862 69.056,42.862 ; 64.294,61.912 69.056,61.912 ; 64.294,80.962 69.056,80.962 ; 64.294,100.013 69.056,100.013 ; 66.675,40.481 66.675,45.244 ; 66.675,59.531 66.675,64.294 ; 66.675,78.581 66.675,83.344 ; 66.675,97.631 66.675,102.394 ; 72.2,30.555 78.2,30.555 ; 75.2,25.555 75.2,35.555 ; 83.344,64.294 88.106,64.294 ; 83.344,83.344 88.106,83.344 ; 83.344,102.394 88.106,102.394 ; 85.725,61.912 85.725,66.675 ; 85.725,80.962 85.725,85.725 ; 85.725,100.013 85.725,104.775 ; 89.042,30.555 95.042,30.555 ; 90.042,44.069 90.042,17.05 154.94,17.05 161.634,48.541 139.087,53.333 137.116,44.061 128.3,44.061 ; 90.043,44.061 100.3,44.061 ; 92.042,25.555 92.042,35.555 ; 100.3,44.061 100.3,48.006 78.2,48.006 78.2,17.05 17.05,17.05 17.05,97.25 20.05,97.25 ccw(c20.05,100.25) 20.05,103.25 17.05,103.25 17.05,113.919 135.35,113.919 135.35,101.838 138.35,100.106 138.35,76.106 135.35,74.374 135.35,48.006 128.3,48.006 128.3,44.061 ; 102.01,29.852 106.669,30.842 ; 102.394,61.912 107.156,61.912 ; 102.394,80.962 107.156,80.962 ; 102.394,100.013 107.156,100.013 ; 103.845,32.676 104.835,28.018 ; 104.775,59.531 104.775,64.294 ; 104.775,78.581 104.775,83.344 ; 104.775,97.631 104.775,102.394 ; 121.444,59.531 126.206,59.531 ; 121.444,78.581 126.206,78.581 ; 121.444,97.631 126.206,97.631 ; 122.781,32.536 127.543,32.536 ; 123.825,57.15 123.825,61.912 ; 123.825,76.2 123.825,80.962 ; 123.825,95.25 123.825,100.013 ; 125.162,30.154 125.162,34.917 ; 144.645,35.501 149.303,34.511 ; 146.479,32.676 147.469,37.335 ; 108.3,44.061 120.3,44.061 120.3,48.006 108.3,48.006 108.3,44.061
Drill Drawing:
  text ".Legend" at 159.386,18.046 h1.52

## Text inside footprints (layer, text, board x,y; h text height)
D0000A: Mechanical 13 "*" at 25.314,80.359 h1.27 r135
D0000B: Mechanical 13 "*" at 24.416,79.461 h1.27 r315
D0001A: Mechanical 13 "*" at 44.364,80.359 h1.27 r135
D0001B: Mechanical 13 "*" at 43.466,79.461 h1.27 r315
D0002A: Mechanical 13 "*" at 63.414,94.646 h1.27 r135
D0002B: Mechanical 13 "*" at 62.516,93.748 h1.27 r315
D0003A: Mechanical 13 "*" at 82.464,97.028 h1.27 r135
D0003B: Mechanical 13 "*" at 81.566,96.13 h1.27 r315
D0004A: Mechanical 13 "*" at 101.514,94.646 h1.27 r135
D0004B: Mechanical 13 "*" at 100.616,93.748 h1.27 r315
D0005A: Mechanical 13 "*" at 120.564,92.265 h1.27 r135
D0005B: Mechanical 13 "*" at 119.666,91.367 h1.27 r315
D0100A: Mechanical 13 "*" at 25.314,61.309 h1.27 r135
D0100B: Mechanical 13 "*" at 24.416,60.411 h1.27 r315
D0101A: Mechanical 13 "*" at 44.364,61.309 h1.27 r135
D0101B: Mechanical 13 "*" at 43.466,60.411 h1.27 r315
D0102A: Mechanical 13 "*" at 63.414,75.596 h1.27 r135
D0102B: Mechanical 13 "*" at 62.516,74.698 h1.27 r315
D0103A: Mechanical 13 "*" at 82.464,77.978 h1.27 r135
D0103B: Mechanical 13 "*" at 81.566,77.08 h1.27 r315
D0104A: Mechanical 13 "*" at 101.514,75.596 h1.27 r135
D0104B: Mechanical 13 "*" at 100.616,74.698 h1.27 r315
D0105A: Mechanical 13 "*" at 120.564,73.215 h1.27 r135
D0105B: Mechanical 13 "*" at 119.666,72.317 h1.27 r315
D0200A: Mechanical 13 "*" at 25.314,42.259 h1.27 r135
D0200B: Mechanical 13 "*" at 24.416,41.361 h1.27 r315
D0201A: Mechanical 13 "*" at 44.364,42.259 h1.27 r135
D0201B: Mechanical 13 "*" at 43.466,41.361 h1.27 r315
D0202A: Mechanical 13 "*" at 63.414,56.546 h1.27 r135
D0202B: Mechanical 13 "*" at 62.516,55.648 h1.27 r315
D0203A: Mechanical 13 "*" at 82.464,58.928 h1.27 r135
D0203B: Mechanical 13 "*" at 81.566,58.03 h1.27 r315
D0204A: Mechanical 13 "*" at 101.514,56.546 h1.27 r135
D0204B: Mechanical 13 "*" at 100.616,55.648 h1.27 r315
D0205A: Mechanical 13 "*" at 120.564,54.165 h1.27 r135
D0205B: Mechanical 13 "*" at 119.666,53.267 h1.27 r315
D0300A: Mechanical 13 "*" at 25.314,23.209 h1.27 r135
D0300B: Mechanical 13 "*" at 24.416,22.311 h1.27 r315
D0301A: Mechanical 13 "*" at 44.364,23.209 h1.27 r135
D0301B: Mechanical 13 "*" at 43.466,22.311 h1.27 r315
D0302A: Mechanical 13 "*" at 63.414,37.496 h1.27 r135
D0302B: Mechanical 13 "*" at 62.516,36.598 h1.27 r315
D0303A: Mechanical 13 "*" at 115.535,22.212 h1.27 r90
D0303B: Mechanical 13 "*" at 114.265,22.212 h1.27 r270
D0304A: Mechanical 13 "*" at 135.735,22.212 h1.27 r90
D0304B: Mechanical 13 "*" at 134.465,22.212 h1.27 r270
D0305A: Mechanical 13 "*" at 141.735,22.212 h1.27 r90
D0305B: Mechanical 13 "*" at 140.465,22.212 h1.27 r270